# Altium PCB PedalBoard.PcbDoc
Units mm, origin at the board's own origin, x right, y up, seen from the top; angles counter-clockwise.
Board outline 38 x 24 mm, 2 copper layers (Top Layer, Bottom Layer); 17 components, 13 nets, 69 pads, 31 vias.
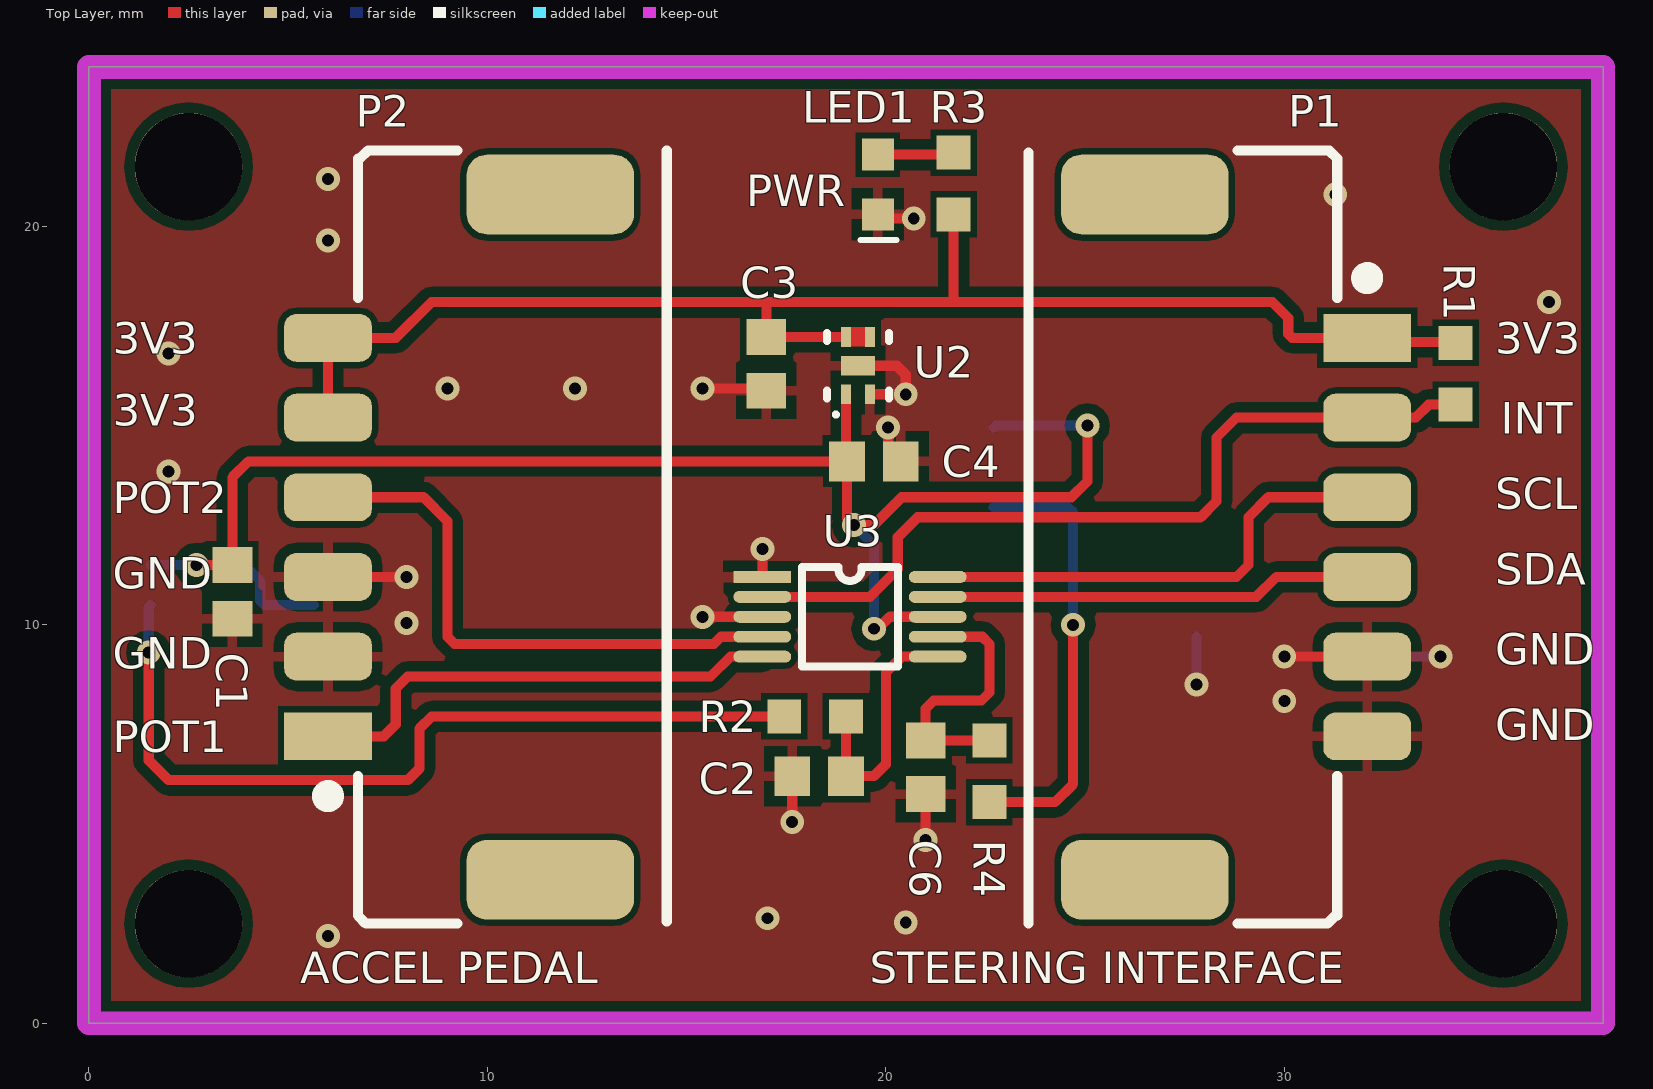
[diagram p0: Top Layer view]
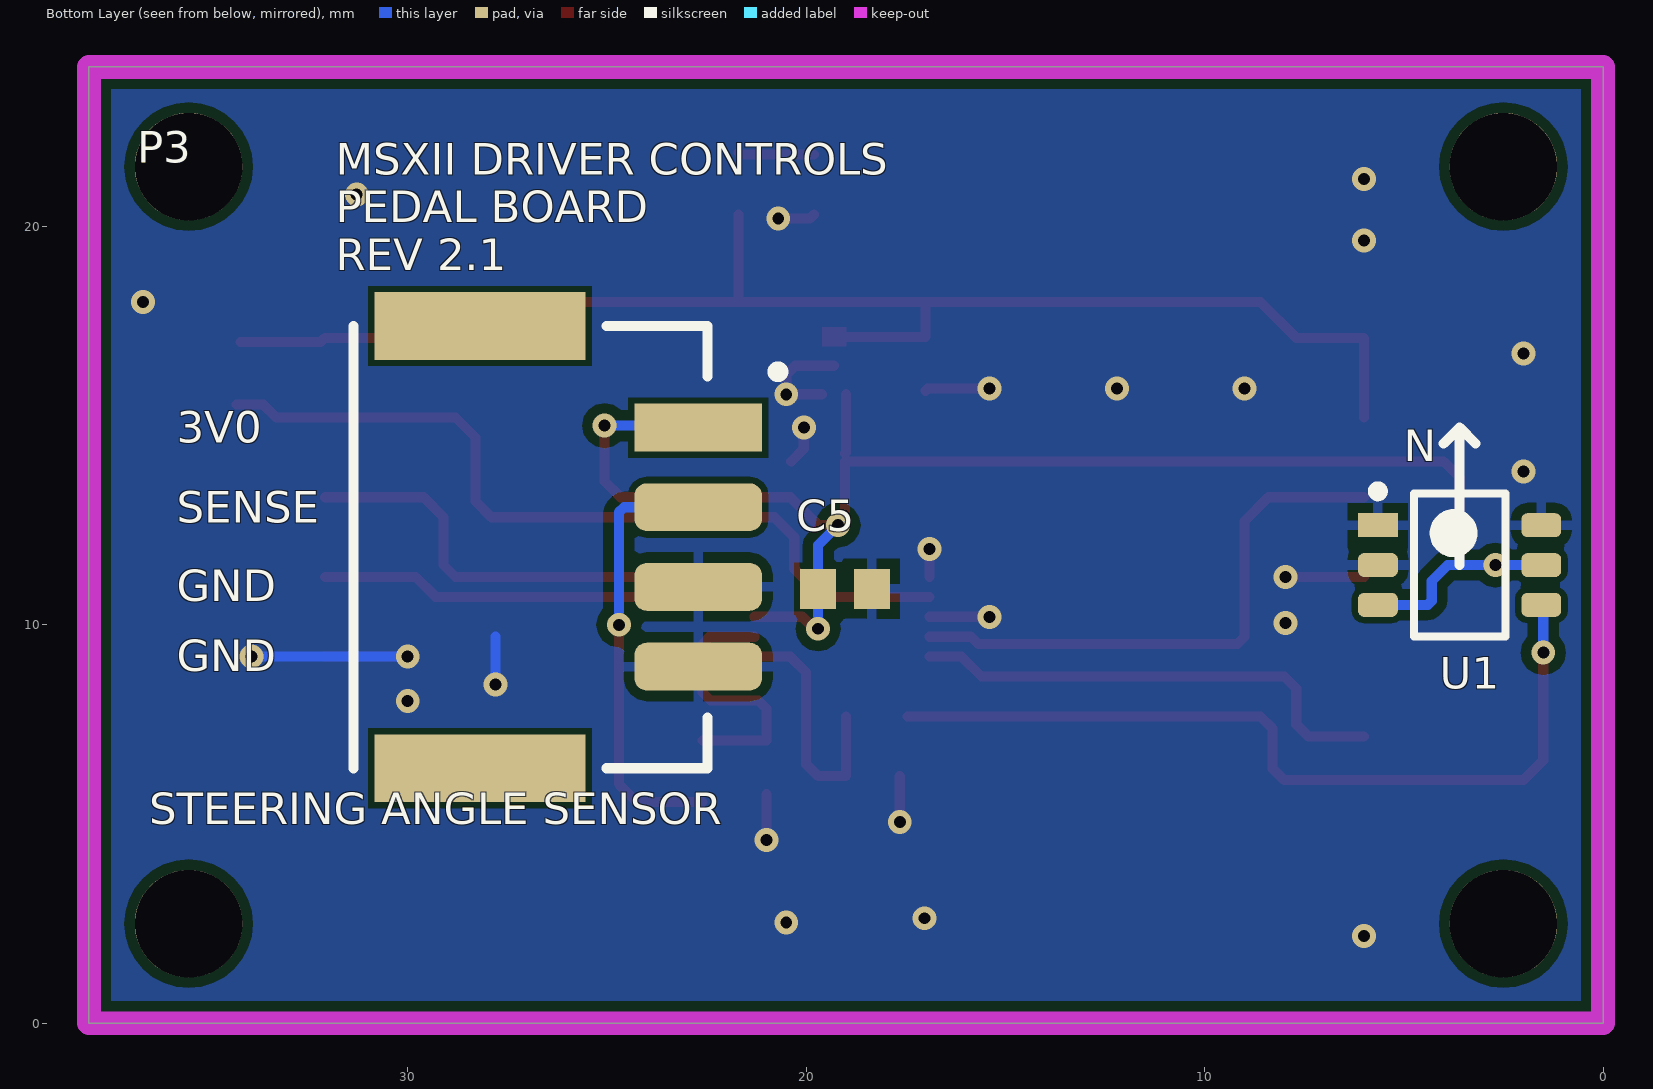
[diagram p1: Bottom Layer view, seen from below]
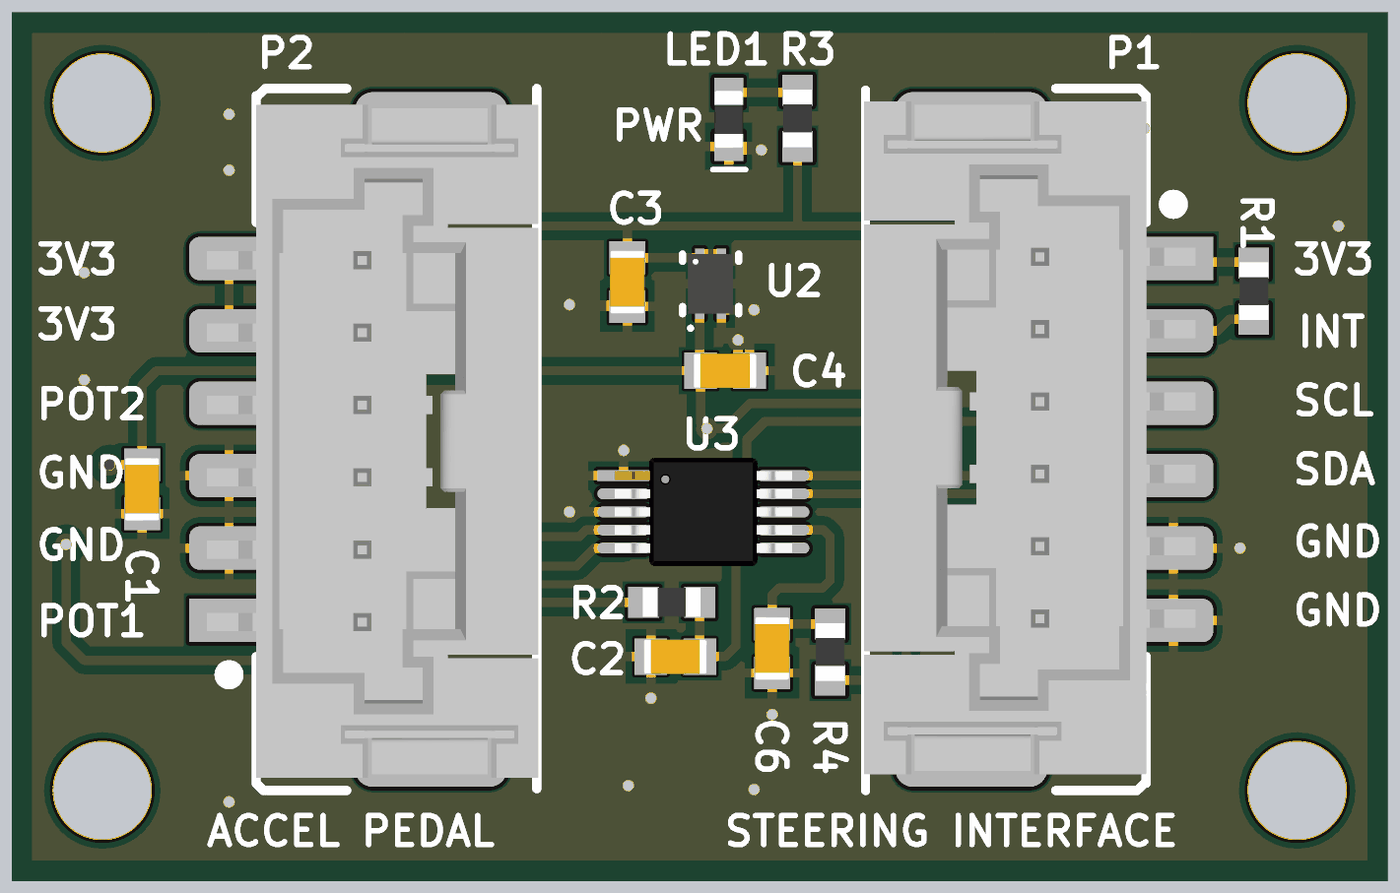
[diagram p2: 3D render of the assembled board from above, using the file's embedded part models]
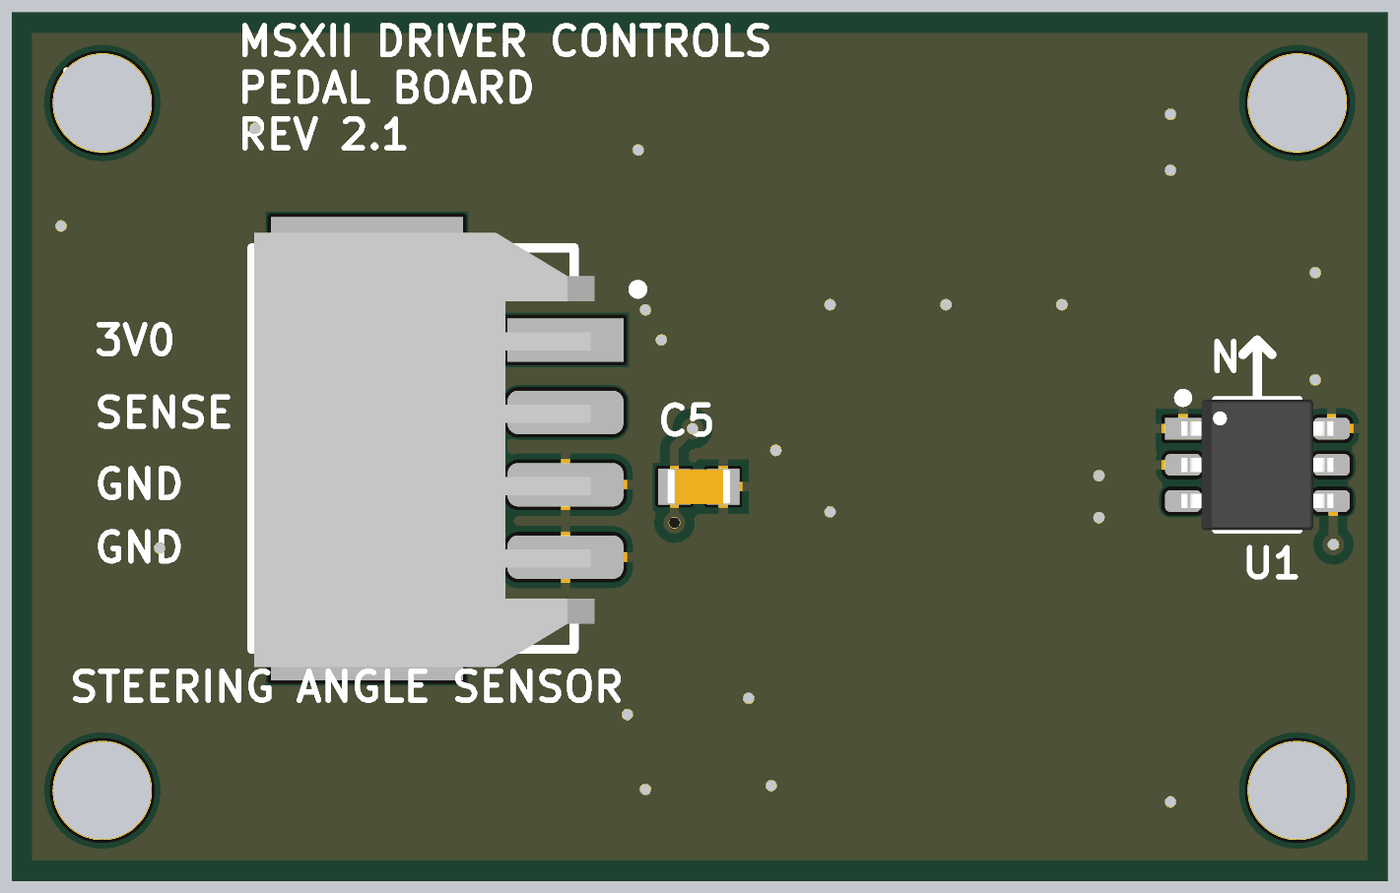
[diagram p3: 3D render of the assembled board from below, using the file's embedded part models]

## Layer stack, top to bottom
Top Solder: solder mask 0.0102, Solder Resist, Dk 3.5
Top Layer: signal copper 0.0356
Dielectric 1: dielectric 0.32, FR-4, Dk 4.8
Bottom Layer: signal copper 0.0356
Bottom Solder: solder mask 0.0102, Solder Resist, Dk 3.5

## Board outline
0,0 38,0 38,24 0,24

## Design rules (kind name [scope] priority, off if disabled: settings)
Clearance [All] p1: gap=0.254 ignorepadtopadclearanceinfootprint=FALSE except(0: Arc-Hole Track-Hole SMDPad-Hole THPad-Hole Via-Hole Fill-Hole Poly-Hole Region-Hole Text-Hole; 0.152: Arc-Arc Arc-Track Arc-SMDPad Track-Track Track-SMDPad SMDPad-SMDPad SMDPad-THPad SMDPad-Fill SMDPad-Poly SMDPad-Region)
PlaneConnect [All] p1: pad.planeconnectstyle=Relief pad.reliefexpansion=0.508 pad.reliefentries=4 pad.reliefconductorwidth=0.254 pad.reliefairgap=0.254 via.planeconnectstyle=Direct via.reliefexpansion=0.508 via.reliefentries=4 via.reliefconductorwidth=0.254 via.reliefairgap=0.254
PolygonConnect [All] p1: thpad.connectstyle=Relief thpad.reliefconductorwidth=0.254 thpad.reliefentries=4 thpad.polygonreliefangle="90 Angle" thpad.airgapwidth=0.254 smdpad.connectstyle=Relief smdpad.reliefconductorwidth=0.254 smdpad.reliefentries=4 smdpad.polygonreliefangle="90 Angle" smdpad.airgapwidth=0.254 via.connectstyle=Direct via.reliefconductorwidth=0.254 via.reliefentries=4 via.polygonreliefangle="90 Angle" via.airgapwidth=0.254
RoutingVias [All] p1: holewidth=0.3 width=0.6 viastyle="Through Hole" minholewidth=0.3 minwidth=0.6 maxholewidth=0.3 maxwidth=0.6
SolderMaskExpansion [All] p1: expansion=0.102
Width [All] p1: maxlimit=0.254 minlimit=0.254 preferedwidth=0.254
29 further rules are at their usual default settings.

## Components (designator, comment, footprint, x,y, rotation, side; value= is the part's Value field where it differs from the comment)
C1 "CAP CER 0.1UF 50V 10% X7R 0603" "CAP, 0603" 3.6,10.825 r270 top
C2 "CAP CER 22PF 100V 5% NP0 0603" "CAP, 0603" 18.325,6.2 r180 top
C3 "CAP CER 1UF 50V 10% X7R 0603" "CAP, 0603" 17,16.55 r270 top
C4 "CAP CER 1UF 50V 10% X7R 0603" "CAP, 0603" 19.7,14.1 r0 top
C5 "CAP CER 0.1UF 50V 10% X7R 0603" "CAP, 0603" 19.025,10.9 r180 bottom
C6 "CAP CER 0.1UF 50V 10% X7R 0603" "CAP, 0603" 21,6.425 r270 top
LED1 "LED GREEN CLEAR 2V 0603" LED_0603 19.79,21.75 r270 top
P1 "DURA-CLIK" "CONN, 6POS DURA-CLIK VERT" 32.08,17.2 r270 top
P2 "DURA-CLIK" "CONN, 6POS DURA-CLIK VERT" 6,7.2 r90 top locked
P3 "CONN 4POS DURA-CLIK RIGHT ANGLE 0.079\"" "CONN, 4POS DURA-CLIK RIGHT ANGLE 0.079\"" 28.188,17.5 r270 bottom
R1 "RES 10K OHM 1% 1/10W 0603" "RES, 0603" 34.3,16.3 r270 top
R2 "RES 100 OHM 1% 1/10W 0603" "RES, 0603" 18.225,7.7 r0 top
R3 "RES 510 OHM 5% 1/10W 0603" "RES, 0603" 21.7,21.075 r90 top
R4 "RES 100 OHM 1% 1/10W 0603" "RES, 0603" 22.6,6.325 r90 top
U1 "EM3242" "IC SENSOR ROTATIONAL ANGLE 360DEG SOP6" 3.6,11.5 r180 bottom
U2 "MIC94310" "IC REG LDO 3V 0.2A 4-TDFN" 19,15.785 r0 top
U3 "Quad ADC" "IC ADC VSSOP10" 16.9,11.2 r0 top

## Footprints (in the part's own frame and the unit in brackets; to place one, negate y for a bottom-side part, rotate by r counter-clockwise, add the part's x,y. Pads: shape width x height; smd on the part's side, far side on the other; paste and mask are expansions set on the pad)
"CAP, 0603" [mm] "Chip Capacitor, 2-Leads, Body 1.60x0.81mm, IPC Medium Density"
  rect 0.9x1 smd mask+0.076: 1(-0.675,0) 2(0.675,0)
  body extent -0.87,-0.48 0.87,0.48, height 0.9
"CONN, 4POS DURA-CLIK RIGHT ANGLE 0.079\"" [mm]
  rect 1.2x3.2 smd: 1(2.55,5.48)
  rrect50% 1.2x3.2 smd: 2(4.55,5.48) 3(6.55,5.48) 4(8.55,5.48)
  rect 1.7x5.3 smd: ""(0,0) ""(11.1,0)
  silkscreen extent 0,-3.18 11.1,7.61, body extent -0.41,-3.12 11.59,6.28, height 6.38
"CONN, 6POS DURA-CLIK VERT" [mm]
  rect 1.2x2.2 smd: 1(0,0)
  rrect50% 1.2x2.2 smd: 2(2,0) 3(4,0) 4(6,0) 5(8,0) 6(10,0)
  rrect50% 2x4.2 smd: 7(-3.6,-5.58) 7(13.6,-5.58)
  silkscreen extent -4.7,-8.5 14.7,0.15, body extent -4.35,-8.54 14.25,0.61, height 7.97
"IC ADC VSSOP10" [mm]
  rect 1.45x0.3 smd: 1(0,0)
  oval 1.45x0.3 smd: 2(0,-0.5) 3(0,-1) 4(0,-1.5) 5(0,-2) 6(4.4,-2) 7(4.4,-1.5) 8(4.4,-1) 9(4.4,-0.5) 10(4.4,0)
  silkscreen extent 1,-2.25 3.4,0.25, body extent -0.25,-2.5 4.65,0.5, height 1.15
"IC REG LDO 3V 0.2A 4-TDFN" [mm] "QFN, 4-Leads, Body 1.20x1.60mm, Pitch 0.50mm/1.40mm, Thermal Pad 0.86x0.50mm, IPC Medium Density"
  rect 0.25x0.5 smd: 1(0,0) 2(0.6,0) 3(0.6,1.44) 4(0,1.44)
  rect 0.86x0.5 smd: 5(0.3,0.715)
  silkscreen extent -0.48,-0.56 1.07,1.54, body extent -0.33,-0.11 0.92,1.54, height 0.6
"IC SENSOR ROTATIONAL ANGLE 360DEG SOP6" [mm] "TSOP, 6-Leads, Body 3.60x3.00mm, Pitch 1.00mm, IPC Medium Density"
  rect 1x0.6 smd: 1(-2.05,1)
  rrect50% 1x0.6 smd: 2(-2.05,0) 3(-2.05,-1) 4(2.05,-1) 5(2.05,0) 6(2.05,1)
  silkscreen extent -2.18,-1.8 1.15,1.97, body extent -2.1,-1.8 2.1,1.8, height 1.05
LED_0603 [mm]
  rect 0.8x0.8 smd: 1(-0.05,0.01) 2(1.45,0.01)
  silkscreen extent 2.09,-0.43 2.09,0.48, body extent -0.1,-0.39 1.5,0.41, height 0.55
"RES, 0603" [mm] "Chip Resistor, 2-Leads, Body 1.60x0.80mm, IPC Medium Density"
  rect 0.85x0.85 smd: 1(-0.775,0) 2(0.775,0)
  body extent -0.8,-0.4 0.8,0.4, height 0.55

## Part data
C1 C5 C6: "0.10µF ±10% 50V Ceramic Capacitor X7R 0603 (1608 Metric)", Capacitance=0.1µF, Manufacturer 1="AVX Corporation", Manufacturer Part Number 1=06035C104KAT2A, Operating Temperature="-55°C ~ 125°C", Package / Case="0603 (1608 Metric)", Ratings=-, Supplier Part Number 1=478-5052-1-ND, Temperature Coefficient=X7R, Tolerance=±10%, Voltage=50V, ComponentLink1Description=http://datasheets.avx.com/X7RDielectric.pdf, ComponentLink1URL=http://datasheets.avx.com/X7RDielectric.pdf, Height - Seated (Max)=-, Lead Spacing=-, Lead Style=-, Mounting Type="Surface Mount, MLCC", Packaging="Cut Tape (CT)", Part Status=Active, Size / Dimension="0.063\" L x 0.032\" W (1.60mm x 0.81mm)", Supplier 1=Digi-Key, Thickness (Max)="0.035\" (0.90mm)"
C2: "22pF 100V Ceramic Capacitor C0G, NP0 0603 (1608 Metric) 0.063\" L x 0.031\" W (1.60mm x 0.80mm)", Capacitance=22pF, Manufacturer 1="Murata Electronics North America", Manufacturer Part Number 1=GCM1885C2A220JA16D, Operating Temperature="-55°C ~ 125°C", Package / Case="0603 (1608 Metric)", Ratings=AEC-Q200, Supplier Part Number 1=490-4942-1-ND, Temperature Coefficient="C0G, NP0", Tolerance=±5%, Voltage=100V, ComponentLink1Description=http://www.murata.com/~/media/webrenewal/support/library/catalog/products/capacitor/mlcc/c03e.ashx, ComponentLink1URL=http://www.murata.com/~/media/webrenewal/support/library/catalog/products/capacitor/mlcc/c03e.ashx, Height - Seated (Max)=-, Lead Spacing=-, Lead Style=-, Mounting Type="Surface Mount, MLCC", Packaging="Cut Tape (CT)", Part Status=Active, Size / Dimension="0.063\" L x 0.031\" W (1.60mm x 0.80mm)", Supplier 1=Digi-Key, Thickness (Max)="0.035\" (0.90mm)"
C3 C4: "1µF ±10% 50V Ceramic Capacitor X7R 0603 (1608 Metric)", Capacitance=1µF, Manufacturer 1="Taiyo Yuden", Manufacturer Part Number 1=UMK107AB7105KA-T, Operating Temperature="-55°C ~ 125°C", Package / Case="0603 (1608 Metric)", Ratings=-, Supplier Part Number 1=587-3247-1-ND, Temperature Coefficient=X7R, Tolerance=±10%, Voltage=50V, ComponentLink1Description=http://www.yuden.co.jp/productdata/catalog/en/mlcc_all_e.pdf, ComponentLink1URL=http://www.yuden.co.jp/productdata/catalog/en/mlcc_all_e.pdf, Height - Seated (Max)=-, Lead Spacing=-, Lead Style=-, Mounting Type="Surface Mount, MLCC", Packaging="Cut Tape (CT)", Part Status=Active, Size / Dimension="0.063\" L x 0.031\" W (1.60mm x 0.80mm)", Supplier 1=Digi-Key, Thickness (Max)="0.037\" (0.95mm)"
LED1: "Green 572nm LED Indication - Discrete 2V 0603 (1608 Metric)", Color=Green, Current - Test=20mA, Lens Color=Colorless, Manufacturer="Wurth Electronics Inc.", Manufacturer Part Number=150060VS75000, Millicandela Rating=40mcd, Package / Case="0603 (1608 Metric)", Supplier Device Package=0603, Supplier Part Number 1=732-4980-1-ND, Voltage - Forward (Vf) (Typ)=2V, Category=Optoelectronics, ComponentLink1Description=http://katalog.we-online.de/led/datasheet/150060VS75000.pdf, ComponentLink1URL=http://katalog.we-online.de/led/datasheet/150060VS75000.pdf, Features=-, Height (Max)=0.80mm, Lens Style/Size="Rectangle with Flat Top, 1.10mm x 0.70mm", Lens Transparency=Clear, Mounting Type="Surface Mount", Packaging="Cut Tape (CT)", Part Status=Active, Pricing 1="1=0.21, 100=0.1617, 500=0.13964 (CAD)", RoHS="RoHS Compliant", Size / Dimension="1.60mm L x 0.80mm W", Stock 1=9408, Supplier 1=Digi-Key, Viewing Angle=140°, Wavelength - Dominant=570nm, Wavelength - Peak=572nm
P1 P2: library part "CONN 6POS DURA-CLIK 0.079\"", "6 Positions Header, Shrouded Connector 0.079\" (2.00mm) Surface Mount, Vertical Tin", Current Rating=-, Insulation Color=Natural, Manufacturer=Molex, Manufacturer Part Number=5600200820, Supplier Part Number 1=WM10866CT-ND, Applications="Automotive, Industrial", Category="Connectors, Interconnects", ComponentLink1Description=http://www.molex.com/pdm_docs/sd/5600200220_sd.pdf, ComponentLink1URL=http://www.molex.com/pdm_docs/sd/5600200220_sd.pdf, Connector Type=Header, Contact Finish - Mating=Tin, Contact Finish - Post=Tin, Contact Finish Thickness - Mating=-, Contact Finish Thickness - Post=-, Contact Length - Mating=-, Contact Length - Post=-, Contact Material="Copper Alloy", Contact Shape=Square, Contact Type="Male Pin", Fastening Type="Latch Lock", Features="Solder Retention", Ingress Protection=-, Insulation Height="0.315\" (8.00mm)", Insulation Material="Polyamide (PA), Nylon", Mated Stacking Heights=9.3mm, Material Flammability Rating=-, Mounting Type="Surface Mount", Number of Positions=6, Number of Positions Loaded=All, Number of Rows=1, Operating Temperature=-, Overall Contact Length=-, Packaging="Cut Tape (CT)", Part Status=Active, Pitch - Mating="0.079\" (2.00mm)", Pricing 1="1=1.76, 10=1.542, 25=1.4512, 50=1.391, 100=1.3305, 250=1.20956 (CAD)", RoHS="RoHS Compliant", Row Spacing - Mating=-, Shrouding="Shrouded - 4 Wall", Stock 1=3826, Style="Board to Cable/Wire", Supplier 1=Digi-Key, Termination=Solder, Voltage Rating=-
P3: "4 Positions Header Connector 0.079\" (2.00mm) Surface Mount, Right Angle Tin", Colour=Natural, Current Rating=3A, Manufacturer=Molex, Manufacturer Part Number=502352-0400, Max Operating Temperature=105°C, Min Operating Temperature=-40°C, Package Quantity=4200, Supplier Part Number 1=WM7171CT-ND, Voltage Rating=125V, ComponentLink1Description=https://datasheet.ciiva.com/10088/5023520400-pcb-headers-10088962.pdf, ComponentLink1URL=https://datasheet.ciiva.com/10088/5023520400-pcb-headers-10088962.pdf, ComponentLink2Description=https://datasheet.ciiva.com/7843/5023520400-pcb-headers-7843990.pdf, ComponentLink2URL=https://datasheet.ciiva.com/7843/5023520400-pcb-headers-7843990.pdf, ComponentLink3Description=https://datasheet.ciiva.com/6004/1699952-6004459.pdf, ComponentLink3URL=https://datasheet.ciiva.com/6004/1699952-6004459.pdf, ComponentLink4Description=https://datasheet.ciiva.com/742/5023520200-sd-742620.pdf, ComponentLink4URL=https://datasheet.ciiva.com/742/5023520200-sd-742620.pdf, ComponentLink5Description=https://datasheet.ciiva.com/742/5023520200-sd-742621.pdf, ComponentLink5URL=https://datasheet.ciiva.com/742/5023520200-sd-742621.pdf, ComponentLink6Description=https://datasheet.ciiva.com/7436/1631264-7436142.pdf, ComponentLink6URL=https://datasheet.ciiva.com/7436/1631264-7436142.pdf, ComponentLink7Description=https://datasheet.ciiva.com/5157/5023520400-pcb-headers-179443-5157278.pdf, ComponentLink7URL=https://datasheet.ciiva.com/5157/5023520400-pcb-headers-179443-5157278.pdf, ComponentLink8Description=https://datasheet.ciiva.com/742/5023520200-sd-742622.pdf, ComponentLink8URL=https://datasheet.ciiva.com/742/5023520200-sd-742622.pdf, Connector Type="Male Pin", Contact Gender=Male, Contact Material="Copper,Copper Alloy", Contact Plating=Nickel,Tin, Depth=9.4mm, Fastening Type=Latch, Gender=Male, Glow Wire Compliant=Non-compliant, Housing Colour=Natural, Housing Material=Polyamide, Length=12mm, Mount="Surface Mount", Number of Circuits=4, Number of Contacts=4, Number of Positions=4, Number of Rows=1, Orientation="Right Angle", Packaging="Tape and Reel", Pitch=2mm, Pricing 1="1=1.37, 10=1.243, 100=1.0656 (USD)", Radiation Hardening=No, REACH SVHC="No SVHC", Stock 1=5500, Supplier 1=Digi-Key, Termination=Solder
R1: "RES SMD 10K OHM 1% 1/10W 0603", Manufacturer 1=Yageo, Manufacturer Part Number 1=RC0603FR-0710KL, Operating Temperature="-55°C ~ 155°C", Package / Case="0603 (1608 Metric)", Power=1/10W, Resistance=10k, Supplier Device Package=0603, Supplier Part Number 1=311-10.0KHRCT-ND, Temperature Coefficient=±100ppm/°C, Tolerance=±1%, ComponentLink1Description=http://www.yageo.com/documents/recent/PYu-RC_Group_51_RoHS_L_7.pdf, ComponentLink1URL=http://www.yageo.com/documents/recent/PYu-RC_Group_51_RoHS_L_7.pdf, Composition="Thick Film", Failure Rate=-, Height - Seated (Max)="0.022\" (0.55mm)", Packaging="Cut Tape (CT)", Part Status=Active, Size / Dimension="0.063\" L x 0.031\" W (1.60mm x 0.80mm)", Supplier 1=Digi-Key
R2 R4: "100 Ohm ±1% 0.1W, 1/10W Chip Resistor 0603 (1608 Metric) Moisture Resistant Thick Film", Manufacturer 1=Yageo, Manufacturer Part Number 1=RC0603FR-07100RL, Operating Temperature="-55°C ~ 155°C", Package / Case="0603 (1608 Metric)", Power=1/10W, Resistance=100, Supplier Device Package=0603, Supplier Part Number 1=311-100HRCT-ND, Temperature Coefficient=±100ppm/°C, Tolerance=±1%, ComponentLink1Description=http://www.yageo.com/documents/recent/PYu-RC_Group_51_RoHS_L_7.pdf, ComponentLink1URL=http://www.yageo.com/documents/recent/PYu-RC_Group_51_RoHS_L_7.pdf, Composition="Thick Film", Failure Rate=-, Height - Seated (Max)="0.022\" (0.55mm)", Packaging="Cut Tape (CT)", Part Status=Active, Size / Dimension="0.063\" L x 0.031\" W (1.60mm x 0.80mm)", Supplier 1=Digi-Key
R3: "RES SMD 510 OHM 5% 1/10W 0603", Manufacturer 1=Yageo, Manufacturer Part Number 1=RC0603JR-07510RL, Operating Temperature="-55°C ~ 155°C", Package / Case="0603 (1608 Metric)", Power=1/10W, Resistance=510, Supplier Device Package=0603, Supplier Part Number 1=311-510GRCT-ND, Temperature Coefficient=±100ppm/°C, Tolerance=±5%, ComponentLink1Description=http://www.yageo.com/documents/recent/PYu-RC_Group_51_RoHS_L_7.pdf, ComponentLink1URL=http://www.yageo.com/documents/recent/PYu-RC_Group_51_RoHS_L_7.pdf, Composition="Thick Film", Failure Rate=-, Height - Seated (Max)="0.022\" (0.55mm)", Packaging="Cut Tape (CT)", Part Status=Active, Size / Dimension="0.063\" L x 0.031\" W (1.60mm x 0.80mm)", Supplier 1=Digi-Key
U1: library part "IC SENSOR ROTATIONAL ANGLE 360DEG SOP6", "Hall Effect Sensor Angle External Magnet, Not Included SMD (SMT) Tab", Manufacturer="AKM Semiconductor", Max Operating Temperature=85°C, Min Operating Temperature=-30°C, Package Quantity=5000, Supplier Part Number 1=974-1044-1-ND, ComponentLink1Description=https://datasheet.ciiva.com/2812/em-324220ver-097-2812049.pdf, ComponentLink1URL=https://datasheet.ciiva.com/2812/em-324220ver-097-2812049.pdf, ComponentLink2Description=https://datasheet.ciiva.com/2812/em3242-2812050.pdf, ComponentLink2URL=https://datasheet.ciiva.com/2812/em3242-2812050.pdf, ComponentLink3Description=https://datasheet.ciiva.com/2812/em3242-2812051.pdf, ComponentLink3URL=https://datasheet.ciiva.com/2812/em3242-2812051.pdf, Manufacturer Part Number=EM3242, Mount="Surface Mount", Pricing 1="1=4.79, 5=4.224, 10=3.731, 25=3.0272, 50=2.6752, 100=2.6048, 500=2.1824, 1000=2.0416 (USD)", Sensing Method="Hall Effect", Stock 1=17913, Supplier 1=Digi-Key, Termination=SMD/SMT
U2: library part "IC REG LDO 3V 0.2A 4-TDFN", Current - Limit (Min)=250mA, Current - Output=200mA, Manufacturer="Microchip Technology", Manufacturer Part Number=MIC94310-PYMT-TR, Operating Temperature="-40°C ~ 125°C", Package / Case="4-UFDFN Exposed Pad", Supplier Device Package="4-TDFN (1.2x1.6)", Supplier Part Number 1=576-4761-1-ND, Voltage - Dropout (Typical)="0.04V @ 200mA", Voltage - Input="Up to 3.6V", Voltage - Output=3V, Category="Integrated Circuits (ICs)", ComponentLink1Description=http://www.microchip.com/mymicrochip/filehandler.aspx?ddocname=en580409, ComponentLink1URL=http://www.microchip.com/mymicrochip/filehandler.aspx?ddocname=en580409, Mounting Type="Surface Mount", Packaging="Cut Tape (CT)", Part Status=Active, Pricing 1="1=0.45, 25=0.3708, 100=0.3386 (CAD)", Regulator Topology="Positive Fixed", RoHS="RoHS Compliant", Stock 1=4802, Supplier 1=Digi-Key
U3: library part "IC ADC 12-BIT VSSOP-10", "12 Bit Analog to Digital Converter 4 Input 1 Sigma-Delta 10-VSSOP", Manufacturer="Texas Instruments", Manufacturer Part Number=ADS1015IDGSR, Operating Temperature="-40°C ~ 125°C", Package / Case="10-TFSOP, 10-MSOP (0.118\", 3.00mm Width)", Supplier Device Package=10-VSSOP, Supplier Part Number 1=296-41185-1-ND, Voltage - Supply, Analog="2 V ~ 5.5 V", Architecture=Sigma-Delta, Category="Integrated Circuits (ICs)", ComponentLink1Description=http://www.ti.com/lit/ds/symlink/ads1013.pdf, ComponentLink1URL=http://www.ti.com/lit/ds/symlink/ads1013.pdf, Configuration=MUX-PGA-ADC, Data Interface=I²C, Features="PGA, Selectable Address", Input Type="Differential, Single Ended", Number of A/D Converters=1, Number of Bits=12, Number of Inputs="2, 4", Packaging="Cut Tape (CT)", Part Status=Active, Pricing 1="1=4.25, 10=3.807, 100=3.1194, 500=2.65552, 1000=2.23959 (CAD)", Ratio - S/H:ADC=-, Reference Type=Internal, RoHS="RoHS Compliant", Sampling Rate (Per Second)=3.3k, Stock 1=4084, Supplier 1=Digi-Key, Voltage - Supply, Digital="2 V ~ 5.5 V"

## Free pads (board coordinates)
  round 2.7 hole 2.7: ""(2.5,2.5) ""(2.5,21.5) ""(35.5,2.5) ""(35.5,21.5)

## Via types
v1: diameter 0.6, hole 0.3, Top Layer to Bottom Layer, tented both sides, 31 vias

## Nets (pads, with @x,y where several pads share a name; then routed paths per layer and width w, separated by ;. In a path a pad name is that pad's centre, name@x,y a point inside that pad or via, vN(x,y) a via of type N, cw(c..) or ccw(c..) an arc to the next point about the centre after c; other vN are vias at no path point)
3V0: C1.1 C4.1 C5.1 P3.1 U1.3 U1.5 U2.1 U3.8 | length 41.3
  Top Layer w0.254: v1(2.7,11.5) C1.1 3.6,13.7 4,14.1 C4.1 19.025,12.675 v1(19.2,12.5) 19.7,12.5 20.4,13.2 24.656,13.2 25.059,13.603 v1(25.059,15) ; U2.1 19,14.325 C4.1@19.025,14.3 ; v1(19.7,9.9) 19.8,9.9 20.1,10.2 U3.8
  Bottom Layer w0.254: U1.5 v1(2.7,11.5) 3.9,11.5 4.3,11.1 4.3,10.6 4.4,10.5 U1.3 ; v1(19.2,12.5) 19.7,12 C5.1 v1(19.7,9.9) ; P3.1 22.758,15 v1(25.059,15)
+3V3: C3.1 P1.1 P2.5 P2.6 R1.1 R3.1 U2.3 U2.4 | length 36.3
  Top Layer w0.254: P2.5 P2.6 7.7,17.2 8.6,18.1 17,18.1 ; U2.4 C3.1 17,18.1 ; R3.1 21.7,18.2 21.8,18.1 ; R1.1@34.2,17.1 32.18,17.1 P1.1 30.2,17.2 30.1,17.3 30.1,17.7 29.7,18.1 21.8,18.1 ; 17,18.1 21.8,18.1
ADC_INTERRUPT: P1.2 R1.2 U3.2 | length 20.8
  Top Layer w0.254: U3.2 19.6,10.7 20.3,11.4 20.3,12.2 20.8,12.7 27.9,12.7 28.3,13.1 28.3,14.7 28.8,15.2 P1.2 33.3,15.2 33.625,15.525 R1.2
AIN0_POT2: P2.4 U3.4 | length 14.2
  Top Layer w0.254: P2.4 8.4,13.2 9,12.6 9,9.7 9.181,9.519 15.682,9.519 15.863,9.7 U3.4
AIN1_POT1: P2.1 U3.5 | length 12.3
  Top Layer w0.254: P2.1 7.4,7.2 7.7,7.5 7.7,8.4 8,8.7 15.6,8.7 16.1,9.2 U3.5
AIN2_MAGNETIC_BRAKE_SENSOR: C2.1 R2.2 U3.6 | length 6.4
  Top Layer w0.254: R2.2 C2.1 19.7,6.2 20,6.5 20,8.8 20.4,9.2 U3.6
AIN3_STEERING_ANGLE_SENSOR: C6.1 R4.2 U3.7 | length 6.8
  Top Layer w0.254: U3.7 22.419,9.7 22.6,9.519 22.6,8.3 22.4,8.1 21.2,8.1 21,7.9 C6.1 R4.2
GND: C1.2 C2.2 C3.2 C4.2 C5.2 C6.2 LED1.2 P1.5 P1.6 P2.2 P2.3 P3.3 P3.4 U1.1 U1.2 U1.6 U2.2 U2.5 U3.1 U3.3 | length 19.9
  Top Layer w0.254: P2.3 v1(7.975,11.2) ; v1(15.4,10.2) U3.3 ; v1(15.4,15.926) 16.949,15.926 C3.2 ; U3.1 v1(16.9,11.9) ; v1(17.65,5.05) C2.2 ; U2.5 20.275,16.5 20.5,16.275 v1(20.5,15.785) U2.2 ; LED1.2 19.9,20.2 v1(20.7,20.2) ; v1(20.059,14.95) 20.059,14.416 C4.2 ; v1(21,4.6) C6.2 ; v1(30,9.2) P1.5
  Bottom Layer w0.254: v1(27.8,8.5) 27.8,9.7 ; v1(30,9.2) v1(33.919,9.2)
  other v1: 6,2.186 20.5,2.53 17.027,2.635 30,8.085 7.975,10.042 2,13.849 9,15.926 12.2,15.926 2,16.812 36.64,18.1 6,19.642 31.28,20.8 6,21.186
I2C_SCL: P1.3 U3.10 | length 12.3
  Top Layer w0.254: U3.10 28.8,11.2 29.1,11.5 29.1,12.7 29.6,13.2 P1.3
I2C_SDA: P1.4 U3.9 | length 11
  Top Layer w0.254: U3.9 29.3,10.7 29.8,11.2 P1.4
NetLED1_1: LED1.1 R3.2 | length 1.9
  Top Layer w0.254: LED1.1 21.65,21.8 R3.2
NetP3_2: P3.2 R4.1 | length 11.2
  Top Layer w0.254: R4.1 24.25,5.55 24.7,6 v1(24.7,10)
  Bottom Layer w0.254: P3.2 24.573,12.95 24.7,12.823 v1(24.7,10)
NetR2_1: R2.1 U1.4 | length 21.3
  Top Layer w0.254: v1(1.5,9.3) 1.5,6.6 2,6.1 8,6.1 8.3,6.4 8.3,7.4 8.6,7.7 R2.1
  Bottom Layer w0.254: v1(1.5,9.3) 1.5,10.45 U1.4
pads on no net: P1.7 P2.7 P3.

## Polygon pours and split planes (outlines as drawn)
GND on Bottom Layer "Bottom Layer-GND" (solid, remove dead copper, pour order 0): 0,0 38,0 38,24 0,24
GND on Top Layer "Top Layer-GND" (solid, remove dead copper, pour order 2): 0,0 38,0 38,24 0,24

## Keep-outs
Keep-Out Layer:
  the board outline again, w0.6

## Other copper
Top Layer:
  region net +3V3: 19,17.462 19.6,17.462 19.6,16.987 19,16.987

## Silkscreen, mask and mechanical layers (free items; w line width, h text height)
Top Overlay:
  text "PWR" at 16.5,20.5 h0.8
  text "3V3" at 0.6,16.8 h0.8
  text "3V3" at 35.3,16.8 h0.8
  text "3V3" at 0.6,15 h0.8
  text "INT" at 35.433,14.8 h0.8
  text "SCL" at 35.3,12.9 h0.8
  text "POT2" at 0.6,12.8 h0.8
  text "SDA" at 35.3,11 h0.8
  text "GND" at 0.6,10.9 h0.8
  text "GND" at 35.3,9 h0.8
  text "GND" at 0.6,8.9 h0.8
  text "GND" at 35.3,7.1 h0.8
  text "POT1" at 0.6,6.8 h0.8
  text "ACCEL PEDAL" at 5.3,1 h0.8
  text "STEERING INTERFACE" at 19.6,1 h0.8
Bottom Overlay:
  lines w0.254: 3.2,14.55 3.6,14.95 ; 3.6,11.5 3.6,14.95 ; 3.6,14.25 3.6,14.95 ; 4,14.55 3.6,14.95 ; 3.6,14.3 3.6,14.3 ; 3.6,14.3 3.6,14.95
  text "MSXII DRIVER CONTROLS / PEDAL BOARD / REV 2.1" at 31.8,18.9 h0.8
  text "3V0" at 35.796,14.563 h0.8
  text "N" at 5,14.1 h0.8
  text "SENSE" at 35.796,12.563 h0.8
  text "GND" at 35.796,10.589 h0.8
  text "GND" at 35.796,8.839 h0.8
  text "STEERING ANGLE SENSOR" at 36.483,4.989 h0.8